# Altium PCB USBtoQuadUART-v1.0.PcbDoc
Units mil, origin at the board's own origin, x right, y up, seen from the top; angles counter-clockwise.
Board outline 3582.68 x 1181.1 mil, 2 copper layers (Top Layer, Bottom Layer); 74 components, 64 nets, 254 pads, 197 vias.
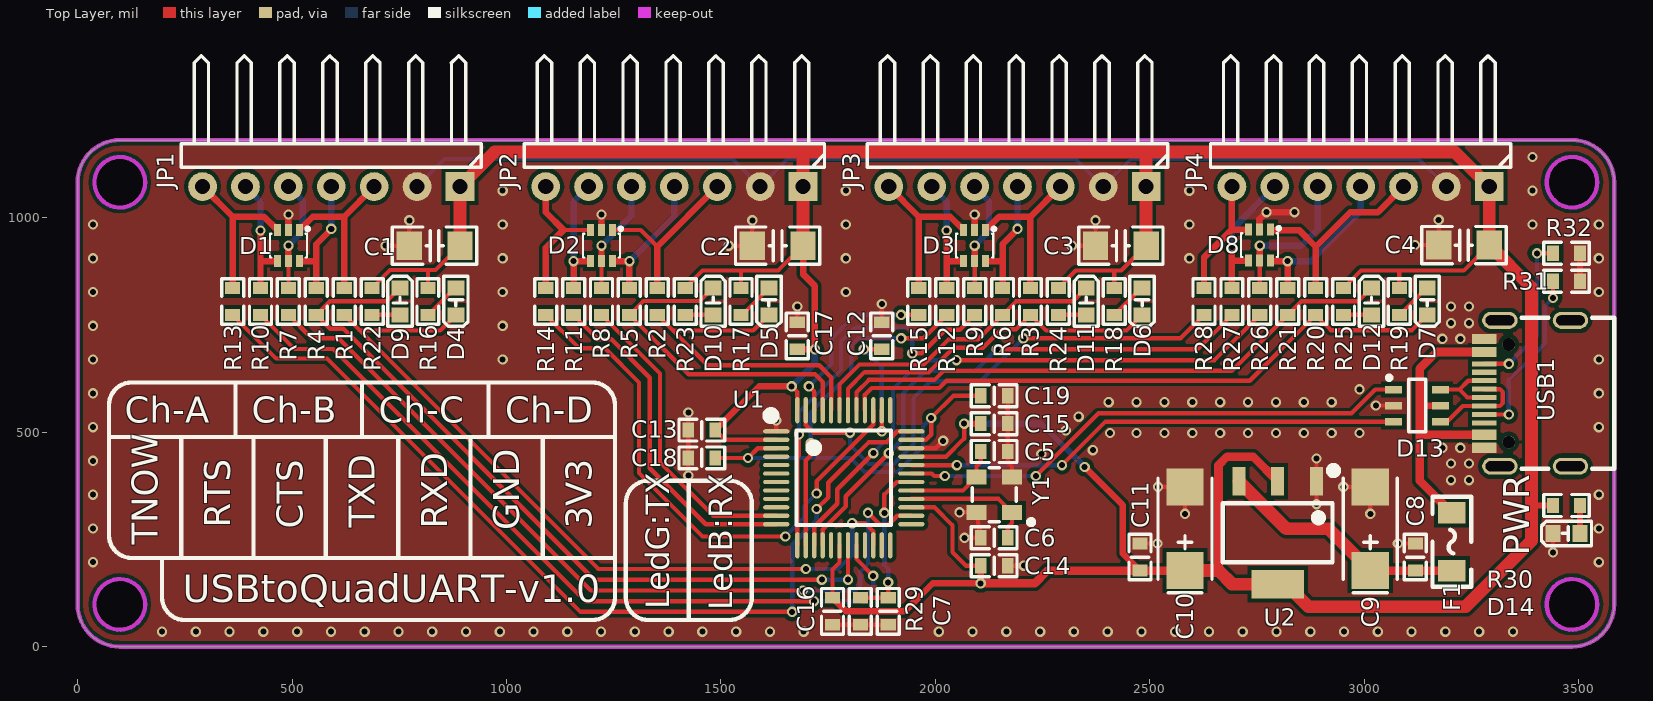
[diagram p0: Top Layer view]
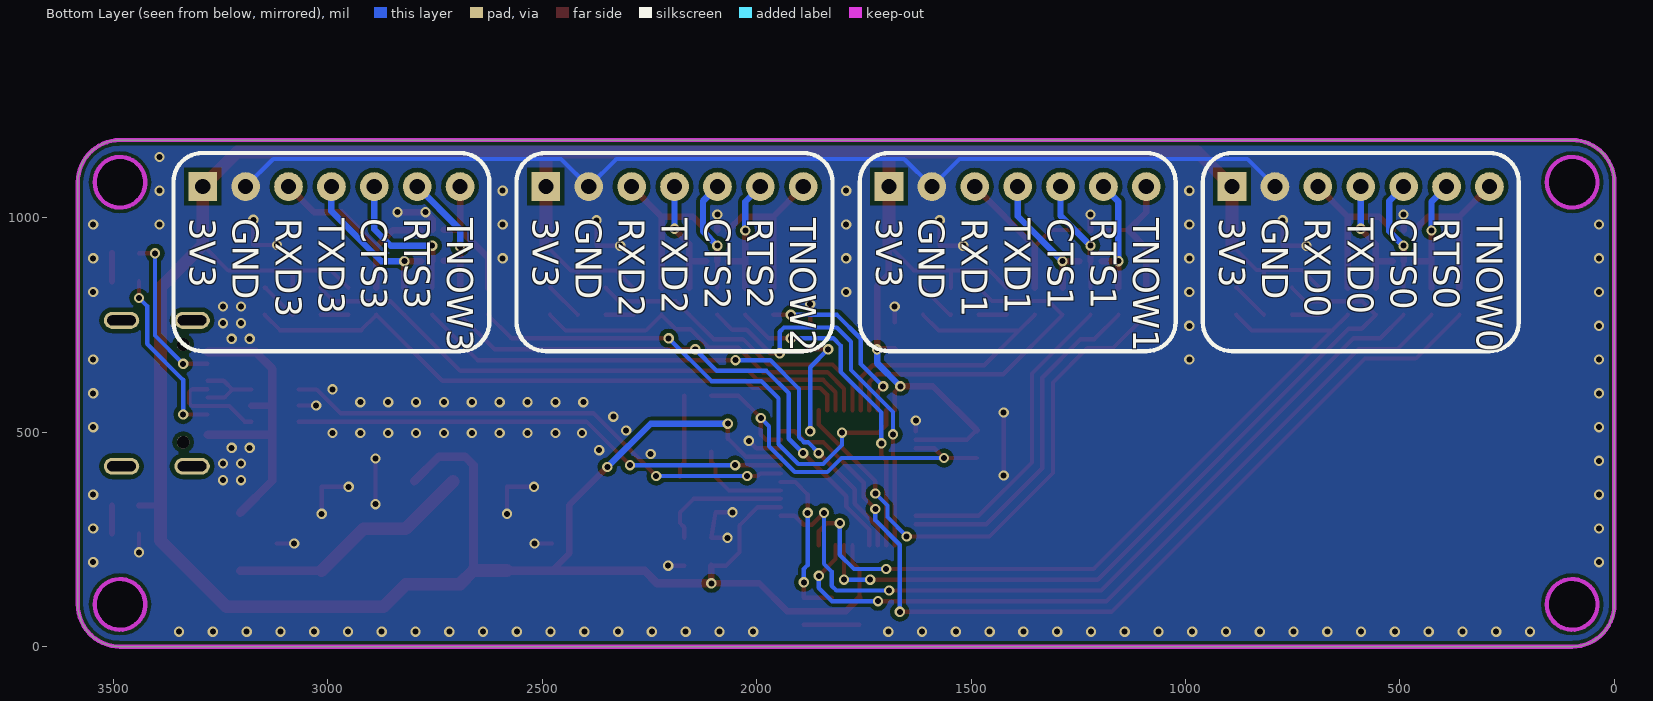
[diagram p1: Bottom Layer view, seen from below]

## Layer stack, top to bottom
Top Solder: solder mask 0.4, Solder Resist, Dk 3.5
Top Layer: signal copper 1.4
Dielectric 1: dielectric 12.6, FR-4, Dk 4.8
Bottom Layer: signal copper 1.4
Bottom Solder: solder mask 0.4, Solder Resist, Dk 3.5

## Board outline
98.43,0 cw(c98.43,98.43) 0,98.43 0,1082.68 cw(c98.43,1082.68) 98.43,1181.1 3484.25,1181.1 cw(c3484.25,1082.68) 3582.68,1082.68 3582.68,98.43 cw(c3484.25,98.43) 3484.25,0
cut-out: 98.43,1023.62 cw(c98.43,1082.68) 39.37,1082.68 cw(c98.43,1082.68) 98.43,1141.73 cw(c98.43,1082.68) 157.48,1082.68 cw(c98.43,1082.68)
cut-out: 98.43,39.37 cw(c98.43,98.43) 39.37,98.43 cw(c98.43,98.43) 98.43,157.48 cw(c98.43,98.43) 157.48,98.43 cw(c98.43,98.43)
cut-out: 3484.25,39.37 cw(c3484.25,98.43) 3425.2,98.43 cw(c3484.25,98.43) 3484.25,157.48 cw(c3484.25,98.43) 3543.31,98.43 cw(c3484.25,98.43)
cut-out: 3484.25,1023.62 cw(c3484.25,1082.68) 3425.2,1082.68 cw(c3484.25,1082.68) 3484.25,1141.73 cw(c3484.25,1082.68) 3543.31,1082.68 cw(c3484.25,1082.68)

## Design rules (kind name [scope] priority, off if disabled: settings)
Clearance [All] p1: gap=10 ignorepadtopadclearanceinfootprint=FALSE except(0: Arc-Hole Track-Hole SMDPad-Hole THPad-Hole Via-Hole Fill-Hole Poly-Hole Region-Hole Text-Hole; 6: SMDPad-SMDPad; 8: Arc-Arc Arc-Track Arc-SMDPad Arc-Via Arc-Fill Arc-Poly Arc-Region Track-Track Track-SMDPad Track-Via Track-Fill Track-Poly Track-Region)
PolygonConnect [All] p1: connectstyle=Direct reliefconductorwidth=10 reliefentries=4 polygonreliefangle="90 Angle" airgapwidth=10
RoutingVias [All] p1: holewidth=28 width=50 viastyle="Through Hole" minholewidth=28 minwidth=50 maxholewidth=28 maxwidth=50
SolderMaskExpansion [All] p1: expansion=4
Width [All] p1: maxlimit=60 minlimit=10 preferedwidth=10
30 further rules are at their usual default settings.

## Components (designator, comment, footprint, x,y, rotation, side; value= is the part's Value field where it differs from the comment)
C1 "22uF" C-1206 832.28,935.01 r0 top value=0.1uF
C2 "22uF" C-1206 1632.28,935.01 r0 top value=0.1uF
C3 "22uF" C-1206 2432.28,935.01 r0 top value=0.1uF
C4 "22uF" C-1206 3232.28,936.22 r0 top value=0.1uF
C5 "20pF" C-0603-M 2137.01,455 r180 top value=0.1uF
C6 "20pF" C-0603-M 2137.01,253.66 r0 top value=0.1uF
C7 "20pF" C-0603-M 1890,82.4 r90 top value=0.1uF
C8 "100nF" C-0603-M 3119,208.75 r270 top value=0.1uF
C9 "10V/100uF" C-钽电容-6032-N 3014,274.89 r270 top value=10uF
C10 "10V/100uF" C-钽电容-6032-N 2582,274.89 r270 top value=10uF
C11 "100nF" C-0603-M 2477,208.75 r270 top value=0.1uF
C12 "100nF" C-0603-M 1874.92,724.68 r270 top value=0.1uF
C13 "100nF" C-0603-M 1455.35,504.94 r0 top value=0.1uF
C14 "100nF" C-0603-M 2137.01,188.66 r180 top value=0.1uF
C15 "100nF" C-0603-M 2137.01,520 r180 top value=0.1uF
C16 "100nF" C-0603-M 1760,82.4 r90 top value=0.1uF
C17 "100nF" C-0603-M 1678.07,724.68 r270 top value=0.1uF
C18 "3.3uF" C-0603-M 1455.35,439.94 r180 top value=0.1uF
C19 "100nF" C-0603-M 2137.01,585 r0 top value=0.1uF
D1 "SMF05CT1G" SOT-363_L2.0-W1.3-P0.65-LS2.1-TL 491.46,935 r270 top
D2 "SMF05CT1G" SOT-363_L2.0-W1.3-P0.65-LS2.1-TL 1221.46,935 r270 top
D3 "SMF05CT1G" SOT-363_L2.0-W1.3-P0.65-LS2.1-TL 2091.46,935 r270 top
D4 "LED-Blue" LED-0603-BLUE 881.81,805 r90 top
D5 "LED-Blue" LED-0603-BLUE 1611.81,805 r90 top
D6 "LED-Blue" LED-0603-BLUE 2481.81,805 r90 top
D7 "LED-Blue" LED-0603-BLUE 3146.75,805 r90 top
D8 "SMF05CT1G" SOT-363_L2.0-W1.3-P0.65-LS2.1-TL 2755.53,936.21 r270 top
D9 "LED-Green" LED-0603-GREEN 751.69,805 r270 top
D10 "LED-Green" LED-0603-GREEN 1481.69,805 r270 top
D11 "LED-Green" LED-0603-GREEN 2351.69,805 r270 top
D12 "LED-Green" LED-0603-GREEN 3016.63,805 r270 top
D13 "USBLC6-2SC6" SOT23-6L 3123,562 r270 top
D14 "LED-Red" LED-0603-Red 3471.44,263.94 r0 top
F1 "FUSE" "FU 1206" 3204,244.76 r270 top
JP1 "HDR-1X7" HDR2.54-WI-7P 591.34,1072.64 r180 top
JP2 "HDR-1X7" HDR2.54-WI-7P 1391.34,1072.64 r180 top
JP3 "HDR-1X7" HDR2.54-WI-7P 2191.34,1072.64 r180 top
JP4 "HDR-1X7" HDR2.54-WI-7P 2991.34,1072.64 r180 top
R1 "10R" R-0603-M 621.57,805 r90 top value=1k
R2 "10R" R-0603-M 1351.57,805 r90 top value=1k
R3 "10R" R-0603-M 2221.57,805 r90 top value=1k
R4 "10R" R-0603-M 556.52,805 r90 top value=1k
R5 "10R" R-0603-M 1286.52,805 r90 top value=1k
R6 "10R" R-0603-M 2156.52,805 r90 top value=1k
R7 "10R" R-0603-M 491.46,805 r90 top value=1k
R8 "10R" R-0603-M 1221.46,805 r90 top value=1k
R9 "10R" R-0603-M 2091.46,805 r90 top value=1k
R10 "10R" R-0603-M 426.4,805 r90 top value=1k
R11 "10R" R-0603-M 1156.4,805 r90 top value=1k
R12 "10R" R-0603-M 2026.4,805 r90 top value=1k
R13 "10R" R-0603-M 361.34,805 r90 top value=1k
R14 "10R" R-0603-M 1091.34,805 r90 top value=1k
R15 "10R" R-0603-M 1961.34,805 r90 top value=1k
R16 "150R" R-0603-M 816.75,805 r270 top value=1k
R17 "150R" R-0603-M 1546.75,805 r270 top value=1k
R18 "150R" R-0603-M 2416.75,805 r270 top value=1k
R19 "150R" R-0603-M 3081.69,805 r270 top value=1k
R20 "10R" R-0603-M 2886.52,805 r90 top value=1k
R21 "10R" R-0603-M 2821.46,805 r90 top value=1k
R22 "330R" R-0603-M 686.63,805 r270 top value=1k
R23 "330R" R-0603-M 1416.63,805 r270 top value=1k
R24 "330R" R-0603-M 2286.63,805 r270 top value=1k
R25 "330R" R-0603-M 2951.57,805 r270 top value=1k
R26 "10R" R-0603-M 2756.4,805 r90 top value=1k
R27 "10R" R-0603-M 2691.34,805 r90 top value=1k
R28 "10R" R-0603-M 2626.28,805 r90 top value=1k
R29 "12k" R-0603-M 1825,82.4 r90 top value=1k
R30 "1k" R-0603-M 3471.44,329 r0 top
R31 "5.1k" R-0603-M 3471.44,852.1 r0 top value=1k
R32 "5.1k" R-0603-M 3471.44,917.16 r0 top value=1k
U1 "CH9344" "LQFP48 7X7_L" 1786.34,393.7 r270 top
U2 "AMS1117" SOT223_L 2798,265.43 r180 top
USB1 "USB-C" USB-C-SMD_16P 3480.67,590.55 r90 top
Y1 "30Mhz" 3225 2137.01,354.33 r90 top value=8MHz

## Footprints (in the part's own frame and the unit in brackets; to place one, negate y for a bottom-side part, rotate by r counter-clockwise, add the part's x,y. Pads: shape width x height; smd on the part's side, far side on the other; paste and mask are expansions set on the pad)
3225 [mm] "贴片晶振"
  rect 0.9x1.2 smd: 1(-1.05,-1.05) 2(1.05,-1.05) 3(1.05,1.05) 4(-1.05,1.05)
  silkscreen extent -1.78,-2.33 1.6,1.3, body extent -1.6,-1.25 1.6,1.25, height 0.78
C-0603-M [mm]
  rect 0.7x0.9 smd: 1(-0.8,0) 2(0.8,0)
  silkscreen extent -1.35,-0.65 1.35,0.65, body extent -0.8,-0.4 0.8,0.4, height 0.6
C-1206 [mm]
  rect 1.5x1.7 smd: 1(-1.5,0) 2(1.5,0)
  silkscreen extent -2.5,-1.1 2.5,1.1, body extent -1.6,-0.8 1.6,0.8, height 0.95
C-钽电容-6032-N [mm]
  rect 2.2x2.2 smd: 1(2.48,0) 2(-2.48,0)
  silkscreen extent -3,-1.6 3.8,1.6, body extent -3.05,-1.68 3.05,1.67, height 2.7
"FU 1206" [mil] "贴片保险丝"
  rect 50x65 smd: 1(-67.5,0) 2(67.5,0)
  silkscreen extent -105,-45 105,45, body extent -63,-32 63,32, height 34
HDR2.54-WI-7P [mm] "弯脚排针，7脚"
  rect 1.7x1.7 hole 0.9: 1(-7.62,0)
  round 1.7 hole 0.9: 2(-5.08,0) 3(-2.54,0) 4(0,0) 5(2.54,0) 6(5.08,0) 7(7.62,0)
  silkscreen extent -8.89,-7.76 8.89,-1.14, body extent -8.89,-7.77 8.89,1.27, height 4.85
LED-0603-BLUE [mm]
  rect 0.9x1 smd: 1(0.8,0) 2(-0.8,0)
  silkscreen extent -1.48,-0.72 1.48,0.72, body extent -0.81,-0.4 0.81,0.4, height 0.6
LED-0603-GREEN [mm]
  rect 0.9x1 smd: 1(0.8,0) 2(-0.8,0)
  silkscreen extent -1.48,-0.72 1.48,0.72, body extent -0.81,-0.4 0.81,0.4, height 0.6
LED-0603-Red [mm]
  rect 0.9x1 smd: 1(0.8,0) 2(-0.8,0)
  silkscreen extent -1.48,-0.72 1.48,0.72, body extent -0.81,-0.4 0.81,0.4, height 0.6
"LQFP48 7X7_L" [mm] "48脚，体宽7x7mm，脚距0.5mm"
  oval 0.25x1.55 smd: 1(-2.75,-4) 2(-2.25,-4) 3(-1.75,-4) 4(-1.25,-4) 5(-0.75,-4) 6(-0.25,-4) 7(0.25,-4) 8(0.75,-4) 9(1.25,-4) 10(1.75,-4) 11(2.25,-4) 12(2.75,-4) 25(2.75,4) 26(2.25,4) 27(1.75,4) 28(1.25,4) 29(0.75,4) 30(0.25,4) 31(-0.25,4) 32(-0.75,4) 33(-1.25,4) 34(-1.75,4) 35(-2.25,4) 36(-2.75,4)
  oval 1.55x0.25 smd: 13(4,-2.75) 14(4,-2.25) 15(4,-1.75) 16(4,-1.25) 17(4,-0.75) 18(4,-0.25) 19(4,0.25) 20(4,0.75) 21(4,1.25) 22(4,1.75) 23(4,2.25) 24(4,2.75) 37(-4,2.75) 38(-4,2.25) 39(-4,1.75) 40(-4,1.25) 41(-4,0.75) 42(-4,0.25) 43(-4,-0.25) 44(-4,-0.75) 45(-4,-1.25) 46(-4,-1.75) 47(-4,-2.25) 48(-4,-2.75)
  silkscreen extent -3.93,-4.57 2.79,2.79, body extent -4.5,-4.5 4.5,4.5, height 1.45
R-0603-M [mm]
  rect 0.7x0.9 smd: 1(-0.8,0) 2(0.8,0)
  silkscreen extent -1.35,-0.65 1.35,0.65, body extent -0.8,-0.4 0.8,0.4, height 0.38
SOT23-6L [mm] "3x1.6x1.1mm(长宽高) 封装库来自淘宝卖家 ID：黄晶宝石"
  rect 0.45x1 smd: 1(-0.95,-1.397) 2(0,-1.397) 3(0.95,-1.397) 4(0.95,1.397) 5(0,1.397) 6(-0.95,1.397)
  silkscreen extent -1.77,-1.78 1.55,0.51, body extent -1.5,-1.4 1.5,1.4, height 1.15
SOT223_L [mil] "6.4x7x1.6mm(长宽高)"
  rect 30x66.93 smd: 1(-90.55,-120) 2(0,-120) 3(90.55,-120)
  rect 122.05x66.93 smd: 2(0,120)
  silkscreen extent -138,-153 128,69, body extent -128,-138 128,138, height 65
SOT-363_L2.0-W1.3-P0.65-LS2.1-TL [mm]
  rect 0.7x0.42 smd: 1(-0.92,0.65) 2(-0.92,0) 3(-0.92,-0.65) 4(0.92,-0.65) 5(0.92,0) 6(0.92,0.65)
  silkscreen extent -1.09,-1.1 0.7,1.24, body extent -1.15,-1.05 1.15,1.05, height 1
USB-C-SMD_16P [mm]
  oval 1x2.1 hole 0.6 slot 1.7 at 90 deg: 0(-4.32,0) 0(-4.32,4.18) 0(4.32,0) 0(4.32,4.18)
  rect 0.6x1.45 smd: A1B12(-3.225,5.095) A4B9(-2.45,5.095) B1A12(3.225,5.095) B4A9(2.45,5.095)
  rect 0.3x1.45 smd: A5(-1.25,5.095) A6(-0.25,5.095) A7(0.25,5.095) A8(-1.75,5.095) B5(1.75,5.095) B6(0.75,5.095) B7(-0.75,5.095) B8(1.25,5.095)
  round 0.75 hole 0.75 unplated: ""(-2.89,3.65) ""(2.89,3.65)
  silkscreen extent -4.47,-2.6 4.47,2.9, body extent -4.47,-2.66 4.47,5.24, height 3.25

## Part data
C1 C2 C3 C4: library part Cap, "无极性电容", LatestRevisionDate=17-Jul-2002, LatestRevisionNote="Re-released for DXP Platform.", PackageDescription="Radial Cap, Thru-Hole; 2 Leads; 0.3 in Pin Spacing", PackageReference=RAD-0.3, Published=8-Jun-2000, Publisher="Altium Limited"
C5 C6 C7 C8 C11 C12 C13 C14 C15 C16 C17 C18 C19: library part Cap_2, "无极性电容", LatestRevisionDate=17-Jul-2002, LatestRevisionNote="Re-released for DXP Platform.", PackageDescription="Radial Cap, Thru-Hole; 2 Leads; 0.3 in Pin Spacing", PackageReference=RAD-0.3, Published=8-Jun-2000, Publisher="Altium Limited"
C9 C10: library part Cap_1, "有极性电容", PackageDescription="Capacitor; 2 Leads", PackageReference=CAPR5-4X5, Published=23-Sep-2002, Publisher="Altium Limited"
D1 D2 D3 D8: "5-Line Transient Voltage Suppressor Array"
D4 D5 D6 D7 D9 D10 D11 D12 D14: library part LED, "Typical RED, GREEN, YELLOW, AMBER GaAs LED", LatestRevisionDate=17-Jul-2002, LatestRevisionNote="Re-released for DXP Platform.", PackageDescription="SM LED; 2 Flat Leads", PackageReference=3.2X1.6X1.1, PackageVersion=Feb-2002, Published=8-Jun-2000, Publisher="Altium Limited"
D13: "Low Capacitance TVS Diode Array"
F1: "贴片保险丝", BOM名称=贴片保险丝, 免费技术支持，联系售后=唯一出售店铺网址https://shop463601444.taobao.c, 封装库来自淘宝卖家  ID：黄晶宝石=其他店铺购入均为盗版假冒封装库，请立即
JP1 JP2 JP3 JP4: library part "Header 7", "7P接插件", 优秀评价可免费更新封装库=ÁªÏµÌÔ±¦ID£º»Æ¾§±¦Ê¯£¬»ñÈ, 卖家免费技术支持，联系售后=唯一出售店铺网址https://shop463601444.taobao, 封装库来自淘宝卖家 ID：黄晶宝石=ÆäËûµêÆÌ¹ºÈë¾ùÎªµÁ°æ£
R1 R2 R3 R4 R5 R6 R7 R8 R9 R10 R11 R12 R13 R14 R15 R16 R17 R18 R19 R20 R21 R22 R23 R24 R25 R26 R27 R28 R29 R30 R31 R32: library part Resistor, "电阻", LatestRevisionDate=17-Jul-2002, LatestRevisionNote="Re-released for DXP Platform.", PackageDescription="Axial Device, Thru-Hole; 2 Leads; 0.4 in Pin Spacing", PackageReference=AXIAL-0.4, Published=8-Jun-2000, Publisher="Altium Limited"
U1: "USB转4串口控制芯片，提供4组全双工的异步串口UART0/1/2/3"
U2: "稳压器-3.3v", LatestRevisionDate=29-May-2009, LatestRevisionNote="IPC-7351 Footprint Added.", PackageDescription="3-Pin Transistor Outline Package 2.54 mm Pitch, 15.1 mm Lead Span", PackageReference=D2PAK, Published=24-Mar-1999, Publisher="Altium Limited"
USB1: library part USB-C-SMD_16P, "USB-C型母接口", BOM名称=USB-C型母接口, 卖家免费查找封装，联系售后=唯一出售店铺网址https://shop463601444.taobao, 封装库来自淘宝卖家 ID：黄晶宝石=其他店铺购入均为盗版假冒封装库，请立即
Y1: library part XTAL_1, "4脚晶振", LatestRevisionDate=17-Jul-2002, LatestRevisionNote="Re-released for DXP Platform.", PackageDescription="Crystal, Thru-Hole; 2 Leads; Body 3.1 x 8.2 mm (Dia.xH)", PackageReference=R38, Published=8-Jun-2000, Publisher="Altium Limited"

## Via types
v1: diameter 24, hole 14, Top Layer to Bottom Layer, tented both sides, 197 vias

## Nets (pads, with @x,y where several pads share a name; then routed paths per layer and width w, separated by ;. In a path a pad name is that pad's centre, name@x,y a point inside that pad or via, vN(x,y) a via of type N, cw(c..) or ccw(c..) an arc to the next point about the centre after c; other vN are vias at no path point)
1V2: C18.1 C19.1 U1.3 U1.35 | length 898.9
  Top Layer w10: C18.1 v1(1562.94,439.94) 1585.6,462.6 U1.3 ; U1.35 1978.28,482.28 1990,494 v1(1990,533) 2042,585 C19.1
  Bottom Layer w10: v1(1562.94,439.94) 1802.06,439.94 1835,407 1911,407 1971,467 1971,514 v1(1990,533)
3V3: C1.2 C2.2 C3.2 C4.2 C10.1 C11.2 C13.2 C14.2 C15.2 C16.2 C17.2 JP1.1 JP2.1 JP3.1 JP4.1 R16.1 R17.1 R18.1 R19.1 R22.1 R23.1 R24.1 R25.1 R30.1 U1.2 U1.18 U1.27 U1.33 U1.48 U2.2 | length 9598.2
  Top Layer w10: R22.1 728.14,878 816.75,878 ; R16.1 816.75,878 ; C1.2 834.33,878 816.75,878 ; R23.1 1457.14,877 1546.75,877 ; C13.2 1509.51,482.28 U1.2 ; R17.1 1546.75,877 ; v1(1665,607) 1678.07,593.93 U1.48 ; C2.2 1633.33,877 1546.75,877 ; C16.2 1760,180 1776.5,196.5 U1.18 ; U1.27 1997.94,324.8 2040.02,282.72 2040.02,219.98 2071.34,188.66 C14.2 ; U1.33 2024.91,442.91 2067,485 v1(2067,520) ; R24.1 2327.14,877 2416.75,877 ; R18.1 2416.75,877 ; C3.2 2433.33,877 2416.75,877 ; R25.1 2992.08,877 3081.69,877 ; R19.1 3081.69,877 ; C4.2 3232.12,877 3081.69,877
  Top Layer w15: C13.2 1588.91,607 v1(1665,607) ; C17.2 v1(1719.14,693.19) 1719.14,840.86 1691.34,868.66 C2.2 ; C16.2 1791.9,82 1928,82 1993.49,147.49 v1(2105.51,147.49) C14.2 ; v1(2067,520) C15.2 ; v1(2348,419) 2437,330 2437,217.26 C11.2 ; 3390,329 R30.1
  Top Layer w20: v1(2105.51,147.49) 2231.49,147.49 2261.26,177.26 C11.2 C10.1 ; 2660,177.26 2660,423 2680,443 2740.43,443 U2.2@2798,385.43
  Top Layer w30: C1.2 JP1.1 971.8,1153.1 1691.34,1153.1 ; C2.2 JP2.1 1691.34,1153.1 ; C3.2 JP3.1 2491.34,1153.1 ; C10.1 2660,177.26 2691.83,145.43 2798,145.43 2817.57,145.43 2870,93 3236,93 3390,247 3390,329 3390,837.56 C4.2 JP4.1 3210.87,1153.1 2491.34,1153.1 ; 1691.34,1153.1 2491.34,1153.1
  Bottom Layer w15: v1(1665,607) 1719.14,661.14 v1(1719.14,693.19) ; v1(2067,520) 2247,520 v1(2348,419)
CC1: R31.1 USB1.A5 | length 410.3
  Top Layer w10: USB1.A5 v1(3337.01,541.32) ; v1(3439.94,813) R31.1
  Bottom Layer w10: v1(3337.01,541.32) 3337.01,622.01 3421,706 3421,794.06 v1(3439.94,813)
CC2: R32.1 USB1.B5 | length 379
  Top Layer w10: USB1.B5 v1(3337.01,659.43) ; v1(3402.84,917.16) R32.1
  Bottom Layer w10: v1(3337.01,659.43) 3402.84,725.26 v1(3402.84,917.16)
CTS0: R7.1 U1.26 | length 1902.8
  Top Layer w10: R7.1 545.96,719 608.27,719 1196.27,131 v1(1691,131) ; v1(1843,312) 1871,284 1890,284 1911.12,305.12 U1.26
  Bottom Layer w10: v1(1691,131) 1814,131 1825,142 1825,175 1843,193 v1(1843,312)
CTS1: R8.1 U1.11 | length 723
  Top Layer w10: R8.1 1357.98,636.98 1357.98,429.39 1482.26,305.12 U1.11
CTS2: R9.1 U1.13 | length 933.3
  Top Layer w10: U1.13 1678.07,441.07 1682,445 v1(1682,495) ; v1(1946,684) 1968,684 2023,739 2056.95,739 R9.1
  Bottom Layer w10: v1(1682,495) 1682,547 1780,645 1780,711 1813,744 1936,744 1946,734 v1(1946,684)
CTS3: R26.1 U1.15 | length 1372.4
  Top Layer w10: U1.15 1717.44,279.44 1771,333 1771,366.76 v1(1855.24,451) ; v1(2049,668) 2650.89,668 R26.1
  Bottom Layer w10: v1@1855.26,451.81 1880.23,476.77 1889.77,476.77 1901,488 1901,601 1968,668 v1(2049,668)
D+: D13.6 USB1.A6 USB1.B6 | length 176.9
  Top Layer w10: D13.6 3221.6,599.4 ; USB1.A6 3240.31,580.69 3221.6,599.4 ; USB1.B6 3242.26,620.06 3221.6,599.4
D-: D13.4 USB1.A7 USB1.B7 | length 234.2
  Top Layer w10: D13.4 3193.28,524.6 3229.7,561.02 USB1.B7 3316.02,561.02 3323,568 3323,593.42 3316.02,600.39 USB1.A7
GND: C1.1 C2.1 C3.1 C4.1 C5.1 C6.1 C7.1 C8.1 C9.2 C10.2 C11.1 C12.1 C13.1 C14.1 C15.1 C16.1 C17.1 C18.2 C19.2 D1.2 D2.2 D3.2 D8.2 D13.2 D14.2 JP1.2 JP2.2 JP3.2 JP4.2 R29.1 R31.2 R32.2 U1.1 U1.34 U2.1 USB1.A1B12 USB1.B1A12 Y1.2 Y1.4 | length 4660.1
  Top Layer w10: v1(718,935.01) C1.1 v1(773.23,994) ; v1(1423.86,398.87) C18.2 C13.1 v1(1423.86,546.01) ; v1(1518,935.01) C2.1 v1(1573.23,994) ; U1.1 v1(1628.87,527) ; C17.1 v1(1678.07,793) ; C16.1 R29.1 C7.1 ; C12.1 v1(1874.92,799) ; U1.34 2000.6,462.6 v1(2018,480) ; v1(2056,312.99) Y1.4 C6.1 v1(2068,253.66) ; C14.1 v1(2206,188.66) ; C19.2 C15.1 C5.1 2168.5,429.5 2178.35,419.65 Y1.2 ; v1(2318,935.01) C3.1 v1(2373.23,994) ; C11.1 v1(2518,240.25) ; v1(2519.01,372.53) C10.2 v1(2582,309.54) ; v1(2888.55,332) U2.1 v1(2888.55,438.85) ; v1(2951.01,372.53) C9.2 v1(3014,309.54) ; v1(3027,562) D13.2 ; v1(3078,240.25) C8.1 ; v1(3118,936.22) C4.1 v1(3173.23,995.21) ; v1(3439.94,220) D14.2
  Top Layer w15: D1.2 v1(491.45,1007.43) ; D2.2 v1(1221.45,1007.43) ; D3.2 v1(2091.45,1007.43) ; D8.2 2755.53,996.53 v1(2772,1013) v1(2837,1013) ; R31.2 R32.2
  Bottom Layer w10: JP1.2 855.7,1137 1526.98,1137 JP2.2 1655.7,1137 2326.98,1137 JP3.2 2455.7,1137 3126.98,1137 JP4.2
  other v1: 196.85,35 275.59,35 354.33,35 433.07,35 511.81,35 590.55,35 669.29,35 748.03,35 826.77,35 905.51,35 984.25,35 1062.99,35 1141.73,35 1220.47,35 1299.21,35 1377.95,35 1456.69,35 1535.43,35 1614.17,35 1692.91,35 2007.87,35 2086.61,35 2165.35,35 2244.09,35 2322.83,35 2401.57,35 2480.31,35 2559.05,35 2637.79,35 2716.53,35 2795.27,35 2874.01,35 2952.75,35 3031.49,35 3110.23,35 3188.97,35 3267.71,35 3346.45,35 36,196.85 3546.68,196.85 36,275.59 3546.68,275.59 36,354.33 3546.68,354.33 3202,388.1 3244,388.1 3202,427.1 3244,427.1 36,433.07 2247.08,449.08 2367,458 3182,463.58 3224,463.58 2407,498 2469,498 2534,498 2599,498 2664,498 2729,498 2794,498 2859,498 2924,498 2989,498 2304,504 36,511.81 3546.68,511.81 2334,536 2404,570 2469,570 2534,570 2599,570 2664,570 2729,570 2794,570 2859,570 2924,570 36,590.55 3546.68,590.55 2989,600 36,669.29 991,669.29 3546.68,669.29 3182,717.52 3224,717.52 36,748.03 991,748.03 3202,754 3244,754 3202,793 3244,793 36,826.77 991,826.77 1791,826.77 3546.68,826.77 36,905.51 991,905.51 1791,905.51 2592,905.51 3546.68,905.51 36,984.25 991,984.25 1791,984.25 2592,984.25 3392,984.25 3546.68,984.25 991,1062.99 1791,1062.99 2592,1062.99 3392,1062.99 3392,1141.73
NetC5_2: C5.2 U1.29 Y1.3 | length 228.3
  Top Layer w10: U1.29 2064.17,364.17 Y1.3 2095.67,420.31 2105.51,430.16 C5.2
NetC6_2: C6.2 U1.28 Y1.1 | length 311
  Top Layer w10: U1.28 2146.85,344.49 Y1.1 2178.35,288.35 2168.5,278.5 C6.2
NetC7_2: C7.2 R29.2 U1.30 | length 384.6
  Top Layer w10: R29.2 C7.2 v1(1890,150) ; v1(1881,312) 1881,355 1909.86,383.86 U1.30
  Bottom Layer w10: v1(1881,312) 1881,190 1890,181 v1(1890,150)
NetC8_2: C8.2 C9.1 F1.2 U2.3 | length 582.8
  Top Layer w20: C9.1 C8.2 F1.2
  Top Layer w30: U2.3 2817.87,275 2916.26,275 C9.1
NetC12_2: C12.2 U1.38 | length 299.4
  Top Layer w10: v1(1833.19,693.19) C12.2 ; v1(1874.88,502) v1(1874.88,502) U1.38
  Bottom Layer w10: v1(1833.19,693.19) 1874.92,651.46 v1(1874.88,502)
NetD1_1: D1.1 JP1.3 R1.2 | length 382.7
  Top Layer w15: D1.1 548.46,1002.64 621.57,1002.64 ; R1.2 621.57,1002.64 ; JP1.3@691.57,1072.64 621.57,1002.64
NetD1_3: D1.3 JP1.7 R13.2 | length 382.7
  Top Layer w15: JP1.7 361.34,1002.64 ; R13.2 361.34,1002.64 ; D1.3 434.45,1002.64 361.34,1002.64
NetD1_4: D1.4 JP1.6 R10.2 | length 290.1
  Top Layer w15: R10.2 426.4,898.79 ; v1(426.4,970) 426.4,898.79 ; D1.4 426.4,898.79
  Bottom Layer w15: JP1.6 426.4,1037.58 v1(426.4,970)
NetD1_5: D1.5 JP1.5 R7.2 | length 264
  Top Layer w10: R7.2 D1.5
  Top Layer w15: D1.5 v1(491.46,935)
  Bottom Layer w15: JP1.5 525,1038.98 525,968.54 v1(491.46,935)
NetD1_6: D1.6 JP1.4 R4.2 | length 289.1
  Top Layer w15: D1.6 556.52,898.79 ; R4.2 556.52,898.79 ; v1@591.34,973.08 556.52,938.26 556.52,898.79
  Bottom Layer w15: v1(591.34,974) JP1.4
NetD2_1: D2.1 JP2.3 R2.2 | length 414.6
  Top Layer w10: D2.1 1312.99,971.22 1351.57,932.64
  Top Layer w15: R2.2 1351.57,932.64 JP2.3@1491.57,1072.64
NetD2_3: D2.3 JP2.7 R14.2 | length 333.5
  Top Layer w10: 1133,971.22 D2.3
  Top Layer w15: R14.2 1091.34,929.56 1133,971.22 1091.34,1012.88 JP2.7
NetD2_4: D2.4 JP2.6 R11.2 | length 290.1
  Top Layer w15: R11.2 v1(1156.4,898.79) D2.4
  Bottom Layer w15: v1(1156.4,898.79) 1156.4,1037.7 JP2.6
NetD2_5: D2.5 JP2.5 R8.2 | length 265.1
  Top Layer w10: R8.2 D2.5
  Top Layer w15: D2.5 v1(1221.46,935)
  Bottom Layer w15: v1(1221.46,935) 1291.34,1004.88 JP2.5
NetD2_6: D2.6 JP2.4 R5.2 | length 319
  Top Layer w15: D2.6 v1(1286.52,898.79) R5.2
  Bottom Layer w15: v1(1286.52,898.79) 1391.34,1003.61 JP2.4
NetD3_1: D3.1 JP3.3 R3.2 | length 382.7
  Top Layer w15: D3.1 2148.46,1002.64 2221.57,1002.64 ; R3.2 2221.57,1002.64 ; JP3.3@2291.57,1072.64 2221.57,1002.64
NetD3_3: D3.3 JP3.7 R15.2 | length 382.7
  Top Layer w15: JP3.7 1961.34,1002.64 ; R15.2 1961.34,1002.64 ; D3.3 2034.45,1002.64 1961.34,1002.64
NetD3_4: D3.4 JP3.6 R12.2 | length 290.1
  Top Layer w15: R12.2 2026.4,898.79 ; v1(2026.4,970) 2026.4,898.79 ; D3.4 2026.4,898.79
  Bottom Layer w15: JP3.6 2026.4,1037.58 v1(2026.4,970)
NetD3_5: D3.5 JP3.5 R9.2 | length 264
  Top Layer w10: R9.2 D3.5
  Top Layer w15: D3.5 v1(2091.46,935)
  Bottom Layer w15: JP3.5 2125,1038.98 2125,968.54 v1(2091.46,935)
NetD3_6: D3.6 JP3.4 R6.2 | length 290
  Top Layer w10: v1@2191.34,973.08 v1(2191.34,974)
  Top Layer w15: D3.6 2156.52,898.79 ; R6.2 2156.52,898.79 ; v1@2191.34,973.08 2156.52,938.26 2156.52,898.79
  Bottom Layer w15: v1(2191.34,974) JP3.4
NetD4_1: D4.1 R16.2 | length 91.2
  Top Layer w10: R16.2 879.74,836.5 D4.1
NetD5_1: D5.1 R17.2 | length 91.2
  Top Layer w10: R17.2 1548.82,773.5 D5.1
NetD6_1: D6.1 R18.2 | length 91.2
  Top Layer w10: R18.2 2479.74,836.5 D6.1
NetD7_1: D7.1 R19.2 | length 91.2
  Top Layer w10: R19.2 3144.69,836.5 D7.1
NetD8_1: D8.1 JP4.3 R20.2 | length 479.5
  Top Layer w15: D8.1@2781.98,971.22 2847.93,971.22 2886.52,932.64 ; R20.2 2886.52,932.64 ; JP4.3 3031.7,1013 2966.88,1013 2886.52,932.64
NetD8_3: D8.3 JP4.7 R28.2 | length 301.7
  Top Layer w15: R28.2 2626.28,907.38 2691.34,972.43 ; JP4.7 2691.34,972.43 ; D8.3 2691.34,972.43
NetD8_4: D8.4 JP4.6 R27.2 | length 316.2
  Top Layer w15: R27.2 2691.34,900 ; v1(2691.34,932) 2691.34,900 ; D8.4 2691.34,900
  Bottom Layer w15: v1(2691.34,932) 2691.34,972.64 JP4.6
NetD8_5: D8.5 JP4.5 R26.2 | length 348.6
  Top Layer w10: R26.2 D8.5@2756.4,898.79
  Top Layer w15: D8.5@2756.4,898.79 v1(2756.4,935)
  Bottom Layer w15: v1(2756.4,935) 2853,935 2891.34,973.34 JP4.5
NetD8_6: D8.6 JP4.4 R21.2 | length 377.2
  Top Layer w15: D8.6@2781.99,898.79 v1(2821.46,898.79) R21.2
  Bottom Layer w15: v1(2821.46,898.79) 2874.79,898.79 2991.34,1015.34 JP4.4
NetD9_1: D9.1 R22.2 | length 65.1
  Top Layer w10: R22.2 D9.1
NetD10_1: D10.1 R23.2 | length 65.1
  Top Layer w10: R23.2 D10.1
NetD11_1: D11.1 R24.2 | length 65.1
  Top Layer w10: R24.2 D11.1
NetD12_1: D12.1 R25.2 | length 65.1
  Top Layer w10: R25.2 D12.1
NetD14_1: D14.1 R30.2 | length 65.1
  Top Layer w15: D14.1 R30.2
RTS0: R10.1 U1.20 | length 1833.4
  Top Layer w10: R10.1 505.9,694 595.96,694 1183.96,106 v1(1717,106) ; U1.20 1815.87,204.13 v1(1855,165)
  Bottom Layer w10: v1(1717,106) 1824,106 1855,137 v1(1855,165)
RTS1: R11.1 U1.12 | length 798.2
  Top Layer w10: R11.1 1212.9,717 1244,717 1334,627 1334,416 1464.57,285.43 U1.12
RTS2: R12.1 U1.14 | length 761.8
  Top Layer w10: U1.14 1697.76,433.76 1709,445 v1(1709,474) ; v1(1920,719) 1971.89,719 R12.1
  Bottom Layer w10: v1(1709,474) 1709,546 1804,641 1804,702 1821,719 v1(1920,719)
RTS3: R27.1 U1.16 | length 1274.5
  Top Layer w10: U1.16 1737.13,273.13 1791,327 1791,350.66 v1(1891.34,451) ; v1(2143,693.19) 2611.02,693.19 R27.1
  Bottom Layer w10: v1(1891.34,451) 1925,484.66 1925,591 1977,643 2092.81,643 v1(2143,693.19)
RXD0: D4.2 R1.1 U1.22 | length 1846.1
  Top Layer w10: R1.1 658.08,737 ; D4.2 845.31,737 658.08,737 ; v1(1697.76,181) 1214.08,181 658.08,737 ; v1(1806,288) 1836,288 1855.24,268.76 U1.22
  Bottom Layer w10: v1(1697.76,181) 1773,181 1806,214 v1(1806,288)
RXD1: D5.2 R2.1 U1.44 | length 781.4
  Top Layer w10: R2.1 1388,737.08 ; D5.2 1575.39,737.08 1388,737.08 ; U1.44 1756.81,628.19 1729,656 1469.08,656 1388,737.08
RXD2: D6.2 R3.1 U1.42 | length 837.3
  Top Layer w10: U1.42 1796.18,601.18 1835,640 1985,640 2042,697 2111,697 2154,740 2188.07,740 R3.1 2258.08,737 2445.31,737 D6.2
RXD3: D7.2 R20.1 U1.40 | length 1453.8
  Top Layer w10: U1.40 1835.55,587.2 1851.35,603 2009,603 2026,620 2733.01,620 R20.1 2922.02,738 3111.25,738 D7.2
TNOW0: R13.1 U1.36 | length 2170.8
  Top Layer w10: R13.1 462.84,672 581.66,672 1172.66,81 v1(1666,81) ; v1(1723,321) 1750,348 1750,382 1844.77,476.77 1885.77,476.77 1910.97,501.97 U1.36
  Bottom Layer w10: v1(1666,81) 1666,237.64 1723,294.64 v1(1723,321)
TNOW1: R14.1 U1.39 | length 1275.4
  Top Layer w10: R14.1 1168.84,696 1229,696 1309,616 1309,405 1457,257 v1(1650,257) ; v1(1723,357) 1723,385.47 1855.24,517.71 U1.39
  Bottom Layer w10: v1(1650,257) 1695,302 1695,329 v1(1723,357)
TNOW2: R15.1 U1.46 | length 420.9
  Top Layer w10: v1(1705,607) 1717.44,594.56 U1.46 ; v1(1920,773.5) R15.1
  Bottom Layer w10: v1(1705,607) 1757,659 1757,718 1812.5,773.5 v1(1920,773.5)
TNOW3: R28.1 U1.47 | length 1224.2
  Top Layer w10: U1.47 1697.76,516.79 1715.54,499 v1(1801,499) ; v1(2205,719) 2571.78,719 R28.1
  Bottom Layer w10: v1(1801,499) 1801,469.88 1844.88,426 1903,426 1949,472 1949,579 1989,619 2105,619 v1(2205,719)
TXD0: D9.2 R4.1 U1.19 | length 1796.9
  Top Layer w10: D9.2 720.2,805 588.01,805 R4.1 589.02,741 619.57,741 1204.57,156 v1(1735,156) ; v1(1796.18,156) U1.19
  Bottom Layer w10: v1(1735,156) v1(1796.18,156)
TXD1: D10.2 R5.1 U1.45 | length 802.5
  Top Layer w10: D10.2 1451.2,806 1319.01,806 R5.1 1425.02,635 1719,635 1737.13,616.87 U1.45
TXD2: D11.2 R6.1 U1.43 | length 728.6
  Top Layer w10: U1.43 1776.5,611.26 1823.24,658 1973,658 2032,717 2100.01,717 R6.1 2188.01,805 2320.2,805 D11.2
TXD3: D12.2 R21.1 U1.41 | length 1343.4
  Top Layer w10: U1.41 1815.87,592.98 1844.89,622 1998,622 2019,643 2690.95,643 R21.1 2852.95,805 2985.14,805 D12.2
UD+: D13.1 U1.31 | length 1209.9
  Top Layer w10: U1.31 1991.46,403.54 1997,398 v1(2022,398) ; v1(2234,398) 2380,544 2970,544 3025.4,599.4 D13.1
  Bottom Layer w10: v1(2022,398) v1(2234,398)
UD-: D13.3 U1.32 | length 1166.2
  Top Layer w10: U1.32 v1(2050,423.23) ; v1(2295,423.23) 2396.37,524.6 D13.3
  Bottom Layer w10: v1(2050,423.23) v1(2295,423.23)
VBUS: D13.5 F1.1 USB1.A4B9 USB1.B4A9 | length 734.1
  Top Layer w15: 3129,562 D13.5
  Top Layer w20: F1.1 3129,387.26 3129,494.09 ; USB1.A4B9 3129,494.09 ; USB1.B4A9 3168.01,687.01 3129,648 3129,562 3129,494.09
pads on no net: U1.4 U1.5 U1.6 U1.7 U1.8 U1.9 U1.10 U1.17 U1.21 U1.23 U1.24 U1.25 U1.37 USB1. USB1.0 USB1.A8 USB1.B8

## Polygon pours and split planes (outlines as drawn)
GND on Bottom Layer "Top Layer-No Net" (solid, remove dead copper, pour order 4): 0,98.43 0,1082.68 cw(c98.43,1082.68) 98.43,1181.1 3484.25,1181.1 cw(c3484.25,1082.68) 3582.68,1082.68 3582.68,98.43 cw(c3484.25,98.43) 3484.25,0 98.43,0 cw(c98.43,98.43)
GND on Top Layer "Top Layer-No Net" (solid, pour order 10): 0,98.43 0,1082.68 cw(c98.43,1082.68) 98.43,1181.1 3484.25,1181.1 cw(c3484.25,1082.68) 3582.68,1082.68 3582.68,98.43 cw(c3484.25,98.43) 3484.25,0 98.43,0 cw(c98.43,98.43)

## Keep-outs
Keep-Out Layer:
  circle w10: c3484.25,1082.68 r59.06
  circle w10: c3484.25,98.43 r59.06
  circle w10: c98.43,1082.68 r59.06
  circle w10: c98.43,98.43 r59.06
  lines w10: 0,98.43 ccw(c98.43,98.43) 98.43,0 3484.25,0 ccw(c3484.25,98.43) 3582.68,98.43 3582.68,1082.68 ccw(c3484.25,1082.68) 3484.25,1181.1 98.43,1181.1 ccw(c98.43,1082.68) 0,1082.68 0,98.43

## Silkscreen, mask and mechanical layers (free items; w line width, h text height)
Top Overlay:
  lines w10: 73,489 1253,489 ; 241.57,206.85 241.57,489 ; 368,489 368,616 ; 410.14,206.85 410.14,489 ; 578.71,206.85 578.71,489 ; 663,489 663,616 ; 747.29,206.85 747.29,489 ; 915.86,206.85 915.86,489 ; 958,489 958,616 ; 1084.43,206.85 1084.43,489 ; 1253,206.85 196.85,206.85 ; 1425,62 1425,387 ; 196.85,206.85 196.85,115 ccw(c249.85,115) 249.85,62 1200,62 ccw(c1200,115) 1253,115 1253,563 ccw(c1200,563) 1200,616 126,616 ccw(c126,563) 73,563 73,259.85 ccw(c126,259.85) 126,206.85 196.85,206.85 ; 1278,115 ccw(c1331,115) 1331,62 1519,62 ccw(c1519,115) 1572,115 1572,334 ccw(c1519,334) 1519,387 1331,387 ccw(c1331,334) 1278,334 1278,115
  text "Ch-A" at 109.67,522.51 h60
  text "Ch-B" at 405.62,522.51 h60
  text "Ch-C" at 701.57,522.51 h60
  text "Ch-D" at 997.52,522.51 h60
  text "RTS" at 355.85,277.65 h60 r90
  text "TXD" at 692.99,277.65 h60 r90
  text "CTS" at 524.42,274.51 h60 r90
  text "RXD" at 861.57,274.51 h60 r90
  text "3V3" at 1198.71,274.51 h60 r90
  text "GND" at 1030.14,271.37 h60 r90
  text "TNOW" at 187.28,237.66 h60 r90
  text "PWR" at 3384,212 h60 r90
  text "USBtoQuadUART-v1.0" at 245.42,103.48 h65
  text "LedG:TX" at 1378.99,86.64 h55 r90
  text "LedB:RX" at 1525.99,85.2 h55 r90
Bottom Overlay:
  lines w10: 223,757 ccw(c291,757) 291,689 891.68,689 ccw(c891.68,757) 959.68,757 959.68,1083 ccw(c891.68,1083) 891.68,1151 291,1151 ccw(c291,1083) 223,1083 223,757 ; 1023,757 ccw(c1091,757) 1091,689 1691.68,689 ccw(c1691.68,757) 1759.68,757 1759.68,1083 ccw(c1691.68,1083) 1691.68,1151 1091,1151 ccw(c1091,1083) 1023,1083 1023,757 ; 1823,757 ccw(c1891,757) 1891,689 2491.68,689 ccw(c2491.68,757) 2559.68,757 2559.68,1083 ccw(c2491.68,1083) 2491.68,1151 1891,1151 ccw(c1891,1083) 1823,1083 1823,757 ; 2623,757 ccw(c2691,757) 2691,689 3291.68,689 ccw(c3291.68,757) 3359.68,757 3359.68,1083 ccw(c3291.68,1083) 3291.68,1151 2691,1151 ccw(c2691,1083) 2623,1083 2623,757
  text "TNOW0" at 321.33,999 h60 r90
  text "RTS0" at 421.33,999 h60 r90
  text "CTS0" at 521.33,999 h60 r90
  text "TXD0" at 621.33,999 h60 r90
  text "RXD0" at 721.33,999 h60 r90
  text "GND" at 821.33,999 h60 r90
  text "3V3" at 921.33,999 h60 r90
  text "TNOW1" at 1121.33,999 h60 r90
  text "RTS1" at 1221.33,999 h60 r90
  text "CTS1" at 1321.33,999 h60 r90
  text "TXD1" at 1421.33,999 h60 r90
  text "RXD1" at 1521.33,999 h60 r90
  text "GND" at 1621.33,999 h60 r90
  text "3V3" at 1721.33,999 h60 r90
  text "TNOW2" at 1921.33,999 h60 r90
  text "RTS2" at 2021.33,999 h60 r90
  text "CTS2" at 2121.33,999 h60 r90
  text "TXD2" at 2221.33,999 h60 r90
  text "RXD2" at 2321.33,999 h60 r90
  text "GND" at 2421.33,999 h60 r90
  text "3V3" at 2521.33,999 h60 r90
  text "TNOW3" at 2721.33,999 h60 r90
  text "RTS3" at 2821.33,999 h60 r90
  text "CTS3" at 2921.33,999 h60 r90
  text "TXD3" at 3021.33,999 h60 r90
  text "RXD3" at 3121.33,999 h60 r90
  text "GND" at 3221.33,999 h60 r90
  text "3V3" at 3321.33,999 h60 r90
Mechanical 1:
  circle w10: c98.43,98.43 r59.06
  circle w10: c98.43,1082.68 r59.06
  circle w10: c3484.25,98.43 r59.06
  circle w10: c3484.25,1082.68 r59.06
  lines w10: 0,98.43 ccw(c98.43,98.43) 98.43,0 3484.25,0 ccw(c3484.25,98.43) 3582.68,98.43 3582.68,1082.68 ccw(c3484.25,1082.68) 3484.25,1181.1 98.43,1181.1 ccw(c98.43,1082.68) 0,1082.68 0,98.43